# EAGLE board protoBoardHB (EAGLE 9.2.2)
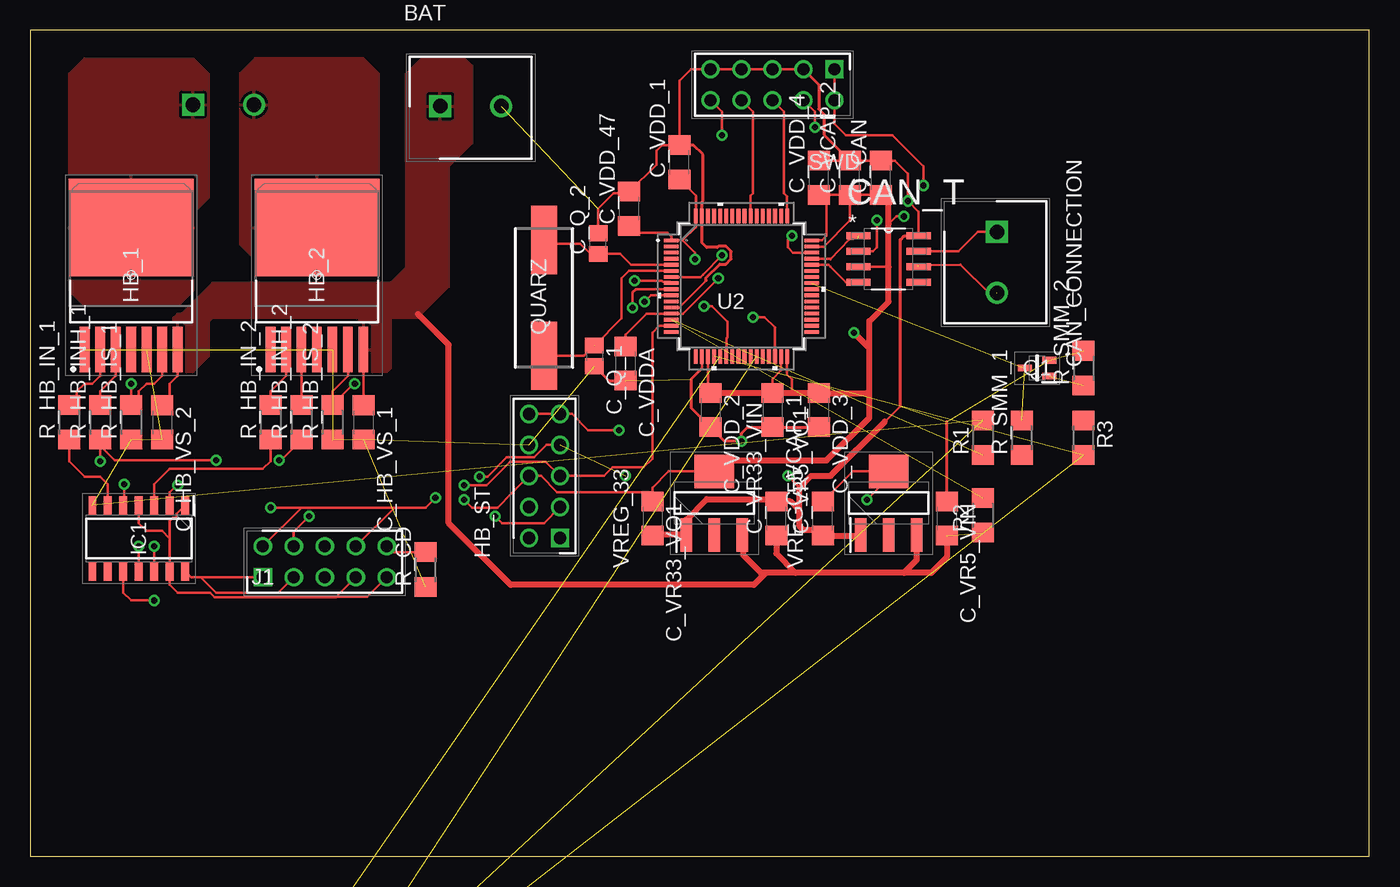
[diagram p0: board, top side]
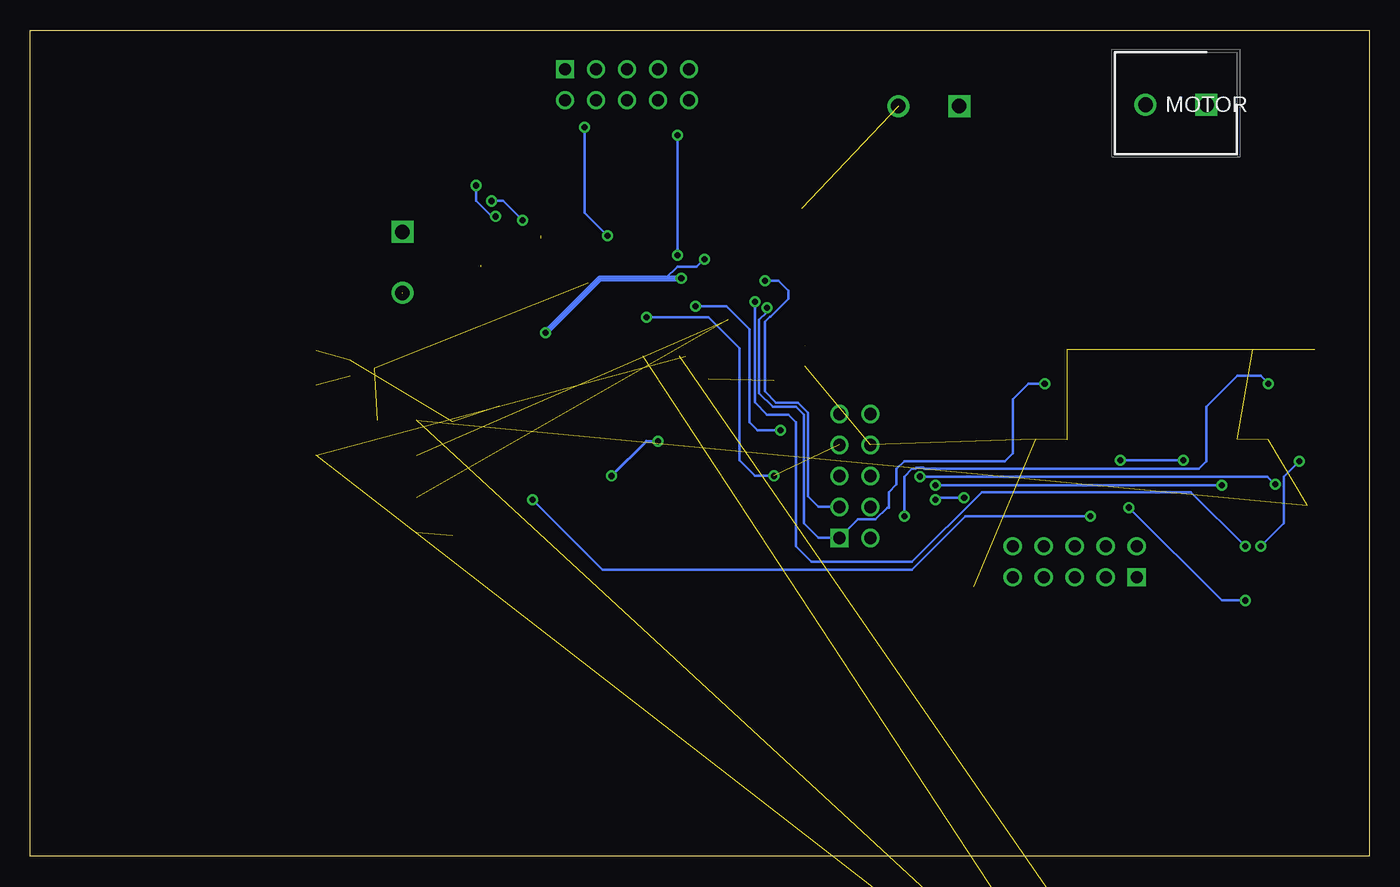
[diagram p1: board, bottom side, seen from below]

Size 109.77 x 67.68 mm. Coordinates in mm from the lower left corner, seen from the top.
Outline: 0,0 109.77,0 109.77,67.68 0,67.68 0,0
Copper layers (1*16): Top 0.035mm / dielectric 1.5mm / Bottom 0.035mm
Design rules "default": minimum track width 6mil, minimum drill 0.35mm, track to track 6mil, track to pad 6mil, pad to pad 6mil, via to via 6mil, smd to smd 6mil, copper to edge 40mil, drill to drill 6mil, minimum pad ring 10mil, minimum via ring 8mil, stop-mask expansion 4mil, vias tented up to drill 0mil, thermal gap 10mil
Net classes: 0 default: width 0.2 mm, drill 0.5 mm

## Footprints (pad centres in the part's own frame; a part is rotated, then mirrored left to right if it is on the bottom)
SHDR2W100P0X500_1X2_1000X820X1 = drill 1.2 pad 1.8 square: 1 0,0 | drill 1.2 pad 1.8: 2 5,0
C1206 = smd 1.6 x 1.8: 1 -1.4,0; 2 1.4,0
C0805 = smd 1.3 x 1.5: 1 -0.85,0; 2 0.85,0
SOIC127P600X175-8N = smd 1.981 x 0.559: 1 -2.464,1.905; 2 -2.464,0.635; 3 -2.464,-0.635; 4 -2.464,-1.905; 5 2.464,-1.905; 6 2.464,-0.635; 7 2.464,0.635; 8 2.464,1.905
TO127P1500X440-8N = smd 3.7 x 0.8: 1 -6.1,3.81; 2 -6.1,2.54; 3 -6.1,1.27; 4 -6.1,0; 5 -6.1,-1.27; 6 -6.1,-2.54; 7 -6.1,-3.81 | smd 8 x 10.25: 8 3.9,0
HDRV10W80P254_2X5_1270X508X864 = drill 1 pad 1.5 square: 1 0,0 | drill 1 pad 1.5: 2 0,2.54; 3 2.54,0; 4 2.54,2.54; 5 5.08,0; 6 5.08,2.54; 7 7.62,0; 8 7.62,2.54; 9 10.16,0; 10 10.16,2.54
SOIC127P600X175-14N = smd 1.525 x 0.65: 1 -2.712,3.81; 2 -2.712,2.54; 3 -2.712,1.27; 4 -2.712,0; 5 -2.712,-1.27; 6 -2.712,-2.54; 7 -2.712,-3.81; 8 2.712,-3.81; 9 2.712,-2.54; 10 2.712,-1.27; 11 2.712,0; 12 2.712,1.27; 13 2.712,2.54; 14 2.712,3.81
SOT65P220X100-3N = smd 1.15 x 0.55: 1 -1,0.65; 2 -1,-0.65; 3 1,0
ABLS-12.000MHZ-B2 = smd 5.6 x 2.1: 1 -4.75,0; 2 4.75,0
R1206 = smd 1.6 x 1.803: 1 -1.422,0; 2 1.422,0
LQFP64-10X10MM = smd 1.194 x 0.305: 1 -5.75,3.75; 2 -5.75,3.25; 3 -5.75,2.75; 4 -5.75,2.25; 5 -5.75,1.75; 6 -5.75,1.25; 7 -5.75,0.75; 8 -5.75,0.25; 9 -5.75,-0.25; 10 -5.75,-0.75; 11 -5.75,-1.25; 12 -5.75,-1.75; 13 -5.75,-2.25; 14 -5.75,-2.75; 15 -5.75,-3.25; 16 -5.75,-3.75; 33 5.75,-3.75; 34 5.75,-3.25; 35 5.75,-2.75; 36 5.75,-2.25; 37 5.75,-1.75; 38 5.75,-1.25; 39 5.75,-0.75; 40 5.75,-0.25; 41 5.75,0.25; 42 5.75,0.75; 43 5.75,1.25; 44 5.75,1.75; 45 5.75,2.25; 46 5.75,2.75; 47 5.75,3.25; 48 5.75,3.75 | smd 0.305 x 1.194: 17 -3.75,-5.75; 18 -3.25,-5.75; 19 -2.75,-5.75; 20 -2.25,-5.75; 21 -1.75,-5.75; 22 -1.25,-5.75; 23 -0.75,-5.75; 24 -0.25,-5.75; 25 0.25,-5.75; 26 0.75,-5.75; 27 1.25,-5.75; 28 1.75,-5.75; 29 2.25,-5.75; 30 2.75,-5.75; 31 3.25,-5.75; 32 3.75,-5.75; 49 3.75,5.75; 50 3.25,5.75; 51 2.75,5.75; 52 2.25,5.75; 53 1.75,5.75; 54 1.25,5.75; 55 0.75,5.75; 56 0.25,5.75; 57 -0.25,5.75; 58 -0.75,5.75; 59 -1.25,5.75; 60 -1.75,5.75; 61 -2.25,5.75; 62 -2.75,5.75; 63 -3.25,5.75; 64 -3.75,5.75
SOT230P700X180-4N = smd 2.75 x 0.95: 1 -2.6,2.3; 2 -2.6,0; 3 -2.6,-2.3 | smd 2.75 x 3.25: 4 2.6,0

## Placement (x,y rotation side)
BAT  282836-2  [SHDR2W100P0X500_1X2_1000X820X1]  33.61,61.48 0 top
C_CAN  100nF  [C1206]  69.73,55.61 90 top
C_HB_VS_1  0.47uF  [C1206]  27.3,35.56 270 top
C_HB_VS_2  0.47uF  [C1206]  10.79,35.56 270 top
C_Q_1  22pF  [C0805]  46.24,41.01 270 top
C_Q_2  22pF  [C0805]  46.56,50.21 90 top
C_VCAP_1  2.2uF  [C1206]  60.84,36.56 270 top
C_VCAP_2  2.2uF  [C1206]  67.19,55.61 90 top
C_VDD_1  100nF  [C1206]  53.23,56.88 90 top
C_VDD_2  100nF  [C1206]  55.77,36.56 270 top
C_VDD_3  100nF  [C1206]  64.66,36.56 270 top
C_VDD_4  100nF  [C1206]  64.66,55.61 90 top
C_VDD_47  4.7nF  [C1206]  49.1,53.07 90 top
C_VDDA  100nF  [C1206]  48.78,40.37 270 top
C_VR5_VIN  1uF  [C1206]  75.13,27.67 270 top
C_VR5_VO1  4.7uF  [C1206]  64.97,27.67 90 top
C_VR33_VIN  1uF  [C1206]  61.16,27.67 90 top
C_VR33_VO1  4.7uF  [C1206]  51,27.67 270 top
CAN_CONNECTION  282836-2  [SHDR2W100P0X500_1X2_1000X820X1]  79.26,51.16 270 top
CAN_T  SN65HVD230QD  [SOIC127P600X175-8N]  70.37,48.94 0 top
HB_1  BTN8982TA  [TO127P1500X440-8N]  8.26,47.62 90 top
HB_2  BTN8982TA  [TO127P1500X440-8N]  23.5,47.62 90 top
HB_ST  M20-9980545  [HDRV10W80P254_2X5_1270X508X864]  43.43,26.08 90 top
IC1  CD74HCT125M  [SOIC127P600X175-14N]  8.89,26.04 270 top
J1  M20-9980545  [HDRV10W80P254_2X5_1270X508X864]  19.05,22.86 0 top
MOTOR  282836-2  [SHDR2W100P0X500_1X2_1000X820X1]  13.34,61.59 180 bottom
Q1  SMMBT3904WT1G  [SOT65P220X100-3N]  82.55,40.01 180 top
QUARZ  ABLS-8.000MHZ-K4T  [ABLS-12.000MHZ-B2]  42.11,45.77 90 top
R1  [R1206]  78.11,34.29 90 top
R2  [R1206]  78.11,27.94 90 top
R3  [R1206]  86.36,34.29 270 top
R4  [R1206]  -1.27,-36.2 0 top  (outside the outline)
R5  [R1206]  -1.27,-40.64 0 top  (outside the outline)
R6  [R1206]  -1.27,-45.09 0 top  (outside the outline)
R7  [R1206]  -1.27,-49.53 0 top  (outside the outline)
R8  [R1206]  -1.27,-53.98 0 top  (outside the outline)
R_CD  1K  [R1206]  32.38,23.5 90 top
R_HB_IN_1  10K  [R1206]  3.17,35.56 90 top
R_HB_IN_2  10K  [R1206]  19.68,35.56 90 top
R_HB_INH_1  10K  [R1206]  5.71,35.56 90 top
R_HB_INH_2  10K  [R1206]  22.23,35.56 90 top
R_HB_IS_1  1k  [R1206]  8.26,35.56 90 top
R_HB_IS_2  1k  [R1206]  24.77,35.56 90 top
R_SMM_1  100K  [R1206]  81.28,34.29 90 top
R_SMM_2  100K  [R1206]  86.36,40.01 90 top
SWD  M20-9980545  [HDRV10W80P254_2X5_1270X508X864]  65.92,64.5 180 top
U2  STM32F4X5RG  [LQFP64-10X10MM]  58.3,46.72 0 top
VREG_33  LDL1117S33R  [SOT230P700X180-4N]  56.08,28.94 90 top
VREG_55  LDL1117S50R  [SOT230P700X180-4N]  70.37,28.94 90 top

## Library data of the parts
BAT CAN_CONNECTION MOTOR = SamacSys_Parts; DESCRIPTION: TERMINAL BLOCK, PCB MOUNT, SIDE WIRE ENTRY, STACKING , 5.00mm PITCH; HEIGHT: 10.2mm; MANUFACTURER_NAME: TE Connectivity; MANUFACTURER_PART_NUMBER: 282836-2; MOUSER_PART_NUMBER: 571-2828362
C_CAN C_HB_VS_1 C_HB_VS_2 C_Q_1 C_Q_2 C_VCAP_1 C_VCAP_2 C_VDD_1-C_VDD_4 C_VDD_47 C_VDDA C_VR5_VIN C_VR5_VO1 C_VR33_VIN C_VR33_VO1 R1-R8 R_CD R_HB_IN_1 R_HB_IN_2 R_HB_INH_1 R_HB_INH_2 R_HB_IS_1 R_HB_IS_2 R_SMM_1 R_SMM_2 = adafruit
CAN_T = ADP_Components; MF: TEXAS INSTRUMENTS; MPN: SN65HVD230QD..; OC_FARNELL: 1648752; OC_NEWARK: 75C7746; PACKAGE: SOIC-8; SUPPLIER: Texas Instruments
HB_1 HB_2 = SamacSys_Parts; DESCRIPTION: New Infineon BTN8982TA Motor Driver,, 7-Pin TO-263-7-1; HEIGHT: 4.4mm; MANUFACTURER_NAME: Infineon; MANUFACTURER_PART_NUMBER: BTN8982TA; MOUSER_PART_NUMBER: 726-BTN8982TA
HB_ST SWD = SamacSys_Parts; DESCRIPTION: M20 Header, Pin, Dil, Vertical, 5+5 W HARWIN M20 Series, 2.54mm Pitch 10 Way 2 Row Straight Pin Header, Through Hole, Solder Termination; HEIGHT: 8.64mm; MANUFACTURER_NAME: HARWIN; MANUFACTURER_PART_NUMBER: M20-9980545; MF: HARWIN; MOUSER_PART_NUMBER: 855-M20-9980545; MPN: M20-9980545; OC_FARNELL: 1022235
IC1 = SamacSys_Parts; DESCRIPTION: High Speed CMOS Logic Quad Buffers with 3-State Outputs; HEIGHT: 1.75mm; MANUFACTURER_NAME: Texas Instruments; MANUFACTURER_PART_NUMBER: CD74HCT125M; MOUSER_PART_NUMBER: 595-CD74HCT125M
J1 = SamacSys_Parts; DESCRIPTION: M20 Header, Pin, Dil, Vertical, 5+5 W HARWIN M20 Series, 2.54mm Pitch 10 Way 2 Row Straight Pin Header, Through Hole, Solder Termination; HEIGHT: 8.64mm; MANUFACTURER_NAME: HARWIN; MANUFACTURER_PART_NUMBER: M20-9980545; MOUSER_PART_NUMBER: 855-M20-9980545
Q1 = SamacSys_Parts; DESCRIPTION: ON SEMICONDUCTOR - SMMBT3904WT1G - TRANSISTOR, AEC-Q101, NPN, 40V, SOT-323; HEIGHT: 1mm; MANUFACTURER_NAME: ON Semiconductor; MANUFACTURER_PART_NUMBER: SMMBT3904WT1G; MOUSER_PART_NUMBER: 863-SMMBT3904WT1G
QUARZ = SamacSys_Parts; DESCRIPTION: ABRACON - ABLS-8.000MHZ-K4T - CRYSTAL, 8MHZ, 18PF, HC-49US; HEIGHT: mm; MANUFACTURER_NAME: ABRACON; MANUFACTURER_PART_NUMBER: ABLS-8.000MHZ-K4T; MF: ABRACON; MOUSER_PART_NUMBER: 815-ABLS-8.0MK4-T; MPN: ABLS-8.000MHZ-K4T; OC_FARNELL: 2467758
U2 = ADP_Components; MANUFACTURER_PART_NUMBER: STM32F4X5RG; OC_FARNELL: unknown; VENDOR: STMicroelectronics
VREG_33 = SamacSys_Parts; DESCRIPTION: STMICROELECTRONICS - LDL1117S33R - LDO, FIXED, 3.3V, 1.2A, SOT-223-3; HEIGHT: 1.8mm; MANUFACTURER_NAME: STMicroelectronics; MANUFACTURER_PART_NUMBER: LDL1117S33R; MF: STMICROELECTRONICS; MOUSER_PART_NUMBER: 511-LDL1117S33R; MPN: LDL1117S33R; OC_FARNELL: 2729708
VREG_55 = SamacSys_Parts; DESCRIPTION: STMICROELECTRONICS - LDL1117S50R - LDO, FIXED, 5V, 1.2A, SOT-223-3; HEIGHT: 1.8mm; MANUFACTURER_NAME: STMicroelectronics; MANUFACTURER_PART_NUMBER: LDL1117S50R; MF: STMICROELECTRONICS; MOUSER_PART_NUMBER: 511-LDL1117S50R; MPN: LDL1117S50R; OC_FARNELL: 2729709

## Nets
CAN1_RX: CAN_T.4 U2.44
CAN1_TX: CAN_T.1 U2.45
CANH: CAN_CONNECTION.1 CAN_T.7
CANL: CAN_CONNECTION.2 CAN_T.6
CD_EN: IC1.1 IC1.4 IC1.13 J1.7 J1.9
CD_VCC: IC1.14 J1.1 J1.3
GND: BAT.2 C_CAN.2 C_HB_VS_1.2 C_HB_VS_2.2 C_Q_1.2 C_Q_2.2 C_VCAP_1.2 C_VCAP_2.2 C_VDD_1.2 C_VDD_2.2 C_VDD_3.2 C_VDD_4.2 C_VDD_47.2 C_VDDA.2 C_VR5_VIN.1 C_VR5_VO1.1 C_VR33_VIN.2 C_VR33_VO1.2 CAN_T.2 CAN_T.8 HB_1.1 HB_1.5 HB_2.1 HB_2.5 HB_ST.8 IC1.7 Q1.2 R1.2 R4.2 R6.2 R8.2 R_CD.1 R_HB_IS_1.1 R_HB_IS_2.1 R_SMM_2.2 SWD.3 SWD.5 SWD.7 SWD.9 U2.12 U2.18 U2.63 VREG_33.1 VREG_55.1
IN_1: IC1.6 R_HB_IN_1.1
IN_2: IC1.3 R_HB_IN_2.1
IN_M_1: HB_ST.7 IC1.5 U2.30
IN_M_2: HB_ST.5 IC1.2 U2.15
INH: IC1.11 R_HB_INH_1.1 R_HB_INH_2.1
INH_EXT: HB_ST.9 HB_ST.10 U2.22
INH_M: IC1.12 U2.10
IS_1: HB_1.6 HB_ST.3 R_HB_IS_1.2 U2.8
IS_2: HB_2.6 HB_ST.1 R_HB_IS_2.2 U2.9
N$1: J1.10 R_CD.2
N$3: HB_1.2 R_HB_IN_1.2
N$4: HB_1.3 R_HB_INH_1.2
N$5: HB_2.2 R_HB_IN_2.2
N$6: HB_2.3 R_HB_INH_2.2
N$8: HB_ST.2
N$9: HB_ST.4
NRST: SWD.10 U2.7
OSC_IN: C_Q_2.1 QUARZ.2 U2.5
OSC_OUT: C_Q_1.1 QUARZ.1 U2.6
OUT_PA4: R3.1
OUT_PA5: R5.1
OUT_PB1: R7.1
PA0: R1.1 R2.2 U2.14
PA4: R3.2 R4.1 U2.20
PA5: R5.2 R6.1 U2.21
PA8: Q1.3 R_SMM_1.2 U2.41
PB1: R7.2 R8.1 U2.27
SS_VN: Q1.1 R_SMM_2.1
SS_VP: R_SMM_1.1
SWCLK: SWD.6 U2.49
SWDIO: SWD.4 U2.46
TRACESWO: SWD.8 U2.55
V5: C_VR5_VO1.2 J1.4 VREG_55.4
V12: BAT.1 C_HB_VS_1.1 C_HB_VS_2.1 C_VR5_VIN.2 C_VR33_VIN.1 HB_1.7 HB_2.7 R2.1 VREG_33.3 VREG_55.3
V33: C_CAN.1 C_VCAP_1.1 C_VCAP_2.1 C_VDD_1.1 C_VDD_2.1 C_VDD_3.1 C_VDD_4.1 C_VDD_47.1 C_VDDA.1 C_VR33_VO1.1 CAN_T.3 HB_ST.6 IC1.10 J1.2 J1.8 SWD.1 SWD.2 U2.1 U2.13 U2.19 U2.31 U2.32 U2.47 U2.48 U2.64 VREG_33.4
V_MOT_MIN: HB_2.8 MOTOR.2
V_MOT_PL: HB_1.8 MOTOR.1

## Tracks (layer width: path | path; a pad name or v marks a point on that pad's centre or on a via)
CAN1_RX
  Top 0.2: U2.44 65.44,48.47 65.61,48.31
  Top 0.203: 65.61,48.31 66.88,47.04 CAN_T.4
CAN1_TX  (1 unrouted)
  Top 0.2: U2.45 65.58,48.97 65.61,48.94
  Top 0.203: 65.61,48.94 67.17,50.55 67.91,50.63
CANH
  Top 0.203: CAN_T.7 76.08,49.58 77.67,51.16 CAN_CONNECTION.1
CANL  (2 unrouted)
  Top 0.203: 72.83,48.43 76.25,48.47 78.62,46.12 79.26,46.12
CD_EN
  Top 0.203: J1.7 25.08,21.27 | 25.08,21.27 25.04,21.23 15.09,21.23 14.74,21.59 12.06,21.59 11.43,22.23 IC1.13 11.43,26.04 | 11.43,26.04 11.43,27.48 11.68,27.73 11.86,27.73 12.01,27.88 12.01,28.06 IC1.1 | IC1.4 8.89,27.3 9.53,26.67 10.79,26.67 11.43,26.04 | 25.08,21.27 27.62,21.27 J1.9
CD_VCC
  Top 0.203: J1.1 13.97,22.86 | 13.97,22.86 13.16,22.86 IC1.14 | J1.3 20.32,21.59 15.24,21.59 13.97,22.86
GND  (via drill 0.5)  (21 unrouted)
  Top 0.2: U2.12 53.2,44.97 55.41,47.18 | U2.18 55.05,39.98
  Top 0.203: C_VDD_4.2 C_VCAP_2.2 C_CAN.2 70.88,57.01 71.96,55.93 v71.96,53.7 72.83,52.83 CAN_T.8 | CAN_T.2 69.1,49.58 69.42,49.9 v69.42,52.12 | C_Q_2.2 46.56,53.07 47.83,54.34 48.97,54.34 C_VDD_47.2 51.32,56.69 51.32,57.83 51.77,58.28 C_VDD_1.2 53.23,63.55 54.18,64.5 SWD.9 SWD.7 SWD.5 SWD.3 | 70.05,35.61 71.32,36.88
  Top 0.254: C_VR5_VIN.1 75.13,35.61 | 63.07,30.21 v62.12,31.16 | C_VDD_3.2 C_VCAP_1.2 58.81,35.16 58.3,34.66 v58.3,34.02 56.91,34.02 C_VDD_2.2 54.18,36.75 54.18,39.1 55.05,39.98 | C_Q_1.2 47.42,38.97 C_VDDA.2 | SWD.3 64.66,63.23 64.66,61.23 65.07,60.81 65.07,59.13 C_VCAP_2.2 | C_VDD_1.2 54.37,58.28 55.13,57.52 55.13,53.7 55.05,53.63 U2.63 55.05,50.29 55.45,49.9 56.32,49.9 56.41,49.99 57.02,49.99 57.45,49.56 57.45,48.96 57.02,48.53 56.52,48.53 55.41,47.41 55.41,47.18 | CAN_T.8 71.64,50.85 71.32,50.53 71.32,36.88
  Top 0.508: VREG_55.1 68,26.27 C_VR5_VO1.1 64.53,26.72 63.38,26.72 63.07,27.04 63.07,28.3 | 63.07,28.3 62.3,29.07 C_VR33_VIN.2 60.98,29.26 55.45,29.26 53.78,27.59 VREG_33.1 51.7,26.34 51.64,26.4 51.51,26.27 C_VR33_VO1.2 | 63.07,28.3 63.07,30.21 64.02,31.16 65.61,31.16 70.05,35.61
  Bottom 0.203: v69.42,52.12 71,53.7 v71.96,53.7
  Bottom 0.254: v62.12,31.16 59.26,34.02 v58.3,34.02
IN_1
  Top 0.203: R_HB_IN_1.1 3.17,32.38 4.45,31.11 5.71,31.11 6.35,30.48 IC1.6
IN_2
  Top 0.203: IC1.3 10.16,30.48 11.43,31.75 19.05,31.75 19.68,32.38 R_HB_IN_2.1
IN_M_1  (via drill 0.5)  (1 unrouted)
  Top 0.2: U2.30 61.05,43.34 60.21,44.18
  Top 0.203: 60.21,44.18 v59.26,44.18 | IC1.5 7.69,28.82 v7.69,30.48 | v36.83,31.11 37.47,31.11 39.04,32.69 41.3,32.69 42.31,33.7 HB_ST.7
  Bottom 0.203: v48.78,31.16 50.37,31.16 51.64,32.43 51.64,41.64 54.18,44.18 v59.26,44.18 | v7.69,30.48 8.33,31.11 v36.83,31.11
IN_M_2  (via drill 0.5)
  Top 0.2: U2.15 51.56,43.47 51,42.91
  Top 0.203: IC1.2 11.43,29.84 11.99,30.41 v12.06,30.41 | v35.56,30.41 37.39,30.41 39.32,32.34 42.25,32.34 HB_ST.5 47.04,31.16 47.74,31.87 50.28,31.87 51,32.59 51,42.91
  Bottom 0.203: v12.06,30.41 v35.56,30.41
INH  (via drill 0.5)
  Top 0.203: IC1.11 v8.89,25.4 | v5.71,32.38 5.71,33.66 | 5.71,33.66 R_HB_INH_1.1 | R_HB_INH_2.1 20.54,32.46 v20.39,32.46 | v15.24,32.46 6.91,32.46 5.71,33.66
  Bottom 0.203: v8.89,25.4 6.99,27.3 6.99,31.11 v5.71,32.38 | v20.39,32.46 v15.24,32.46
INH_EXT  (via drill 0.5)
  Top 0.203: v48.26,34.92 45.72,34.92 44.4,36.24 HB_ST.9 HB_ST.10 | v55.24,45.09 55.88,45.09 57.15,43.81 57.15,42.55 57.05,42.45 U2.22
  Bottom 0.203: v48.26,34.92 50.16,34.92 50.8,35.56 50.8,43.18 52.7,45.09 v55.24,45.09
INH_M  (via drill 0.5)
  Top 0.2: U2.10 50.89,45.97 v50.37,45.45
  Top 0.203: IC1.12 v10.16,25.4
  Bottom 0.203: v50.37,45.45 50.37,37.2 49.37,36.2 47.62,36.2 46.99,35.56 46.99,25.4 45.72,24.13 37.47,24.13 31.75,29.84 14.61,29.84 v10.16,25.4
IS_1  (via drill 0.5)
  Top 0.2: U2.8 52.46,47.06 51.85,47.06 51.74,47.18 v49.53,47.18 | v38.1,27.87 38.66,27.3 42.11,27.3 HB_ST.3
  Top 0.203: HB_1.6 10.79,39.37 10.16,38.73 9.53,38.73 8.89,38.1 8.89,37.62 R_HB_IS_1.2 v8.26,38.73
  Bottom 0.2: v49.53,47.18 48.45,47.18 47.62,46.35 47.62,45.7 49.09,44.23 49.11,44.23 49.53,43.81 49.53,38.1 48.61,37.18 46.84,37.18 46,36.34 46,29.49 45.13,28.62 HB_ST.3
  Bottom 0.203: v8.26,38.73 8.89,39.37 10.79,39.37 13.34,36.83 13.34,32.38 13.97,31.75 36.47,31.75 36.54,31.82 37.12,31.82 37.2,31.75 37.47,31.75 38.1,31.11 v38.1,27.87
IS_2  (via drill 0.5)
  Top 0.2: v49.38,44.94 49.38,46.21 49.65,46.47 U2.9
  Top 0.203: HB_2.6 26.04,39.37 24.77,38.1 R_HB_IS_2.2 26.52,38.73 v26.6,38.73
  Bottom 0.2: v49.38,44.94 49.38,44.6 50.01,43.97 50.01,37.95 48.9,36.83 46.99,36.83 46.35,36.2 46.35,27.3 45.13,26.08 HB_ST.1 41.89,27.62 40.47,27.62 39.51,28.57 39.37,28.57 39.37,29.84
  Bottom 0.203: v26.6,38.73 27.94,38.73 29.21,37.47 29.21,33.02 29.84,32.38 38.1,32.38 38.73,31.75 38.73,30.48 39.37,29.84
N$1
  Top 0.203: R_CD.2 29.69,24.92 J1.10
N$3
  Top 0.203: R_HB_IN_1.2 3.81,37.62 3.81,38.1 4.45,38.73 5.08,38.73 5.71,39.37 HB_1.2
N$4
  Top 0.203: R_HB_INH_1.2 5.71,38.1 6.99,39.37 HB_1.3
N$5
  Top 0.203: R_HB_IN_2.2 19.68,38.1 20.95,39.37 HB_2.2
N$6
  Top 0.203: R_HB_INH_2.2 HB_2.3
NRST  (via drill 0.5)
  Top 0.2: U2.7 54.93,47.47 55.13,47.67
  Top 0.203: SWD.10 56.72,61.01 v56.72,59.1 | 55.13,47.67 v56.72,49.26
  Bottom 0.203: v56.72,59.1 v56.72,49.26
OSC_IN
  Top 0.2: U2.5 49.25,48.47
  Top 0.203: QUARZ.2 42.43,50.2 45.09,50.2 45.92,49.36 C_Q_2.1 48.36,49.36 49.25,48.47
OSC_OUT  (1 unrouted)
  Top 0.2: U2.6 49.08,47.97
  Top 0.203: QUARZ.1 45.34,41.02 45.38,41.06 45.44,41.06 C_Q_1.1 48.46,44.08 48.46,47.35 49.08,47.97
PA0  (2 unrouted)
PA4  (2 unrouted)
PA5  (2 unrouted)
PA8  (2 unrouted)
PB1  (2 unrouted)
SS_VN  (1 unrouted)
SWCLK
  Top 0.2: U2.49 62.05,54.08 61.8,54.34
  Top 0.203: SWD.6 61.8,61.01 61.8,54.34
SWDIO  (via drill 0.5)
  Top 0.2: U2.46 62.54,49.47 62.12,49.9
  Top 0.203: SWD.4 64.34,61.01 v64.34,59.74 | v62.43,50.85 62.12,50.53 62.12,49.9
  Bottom 0.203: v64.34,59.74 64.34,52.75 v62.43,50.85
TRACESWO
  Top 0.2: U2.55 59.05,54.14 59.26,54.34
  Top 0.203: SWD.8 59.26,61.01 59.26,54.34
V5  (via drill 0.5)
  Top 0.203: C_VR5_VO1.2 67.44,31.54 VREG_55.4 70.37,31 v68.58,29.21 | J1.4 21.59,26.6 v22.86,27.87
  Bottom 0.203: v22.86,27.87 33.09,27.87 37.47,23.5 62.87,23.5 v68.58,29.21
V12  (1 unrouted)
  Top 0.203: 58.45,26.27 VREG_33.3 | C_HB_VS_2.1 11.43,37.59 11.43,38.73 12.06,39.37 HB_1.7 | C_HB_VS_1.1 HB_2.7
  Top 0.508: C_VR5_VIN.2 75.13,24.5 73.86,23.23 71.64,23.23 | 71.64,23.23 62.75,23.23 | 62.75,23.23 60.33,23.23 | 60.33,23.23 59.89,23.23 58.45,24.66 58.45,26.27 | C_VR33_VIN.1 61.16,24.81 62.75,23.23 | VREG_55.3 72.67,24.25 71.64,23.23 | 60.33,23.23 59.33,22.23 39.37,22.23 34.29,27.3 34.29,41.91 31.75,44.45
  pour Top: 35.56,65.41 32.07,65.41 30.8,64.14 30.8,48.26 29.53,46.99 14.92,46.99 12.38,44.45 12.06,44.45 11.75,44.13 11.75,40.01 12.06,39.69 13.34,39.69 14.61,40.96 14.61,43.81 14.92,44.13 31.75,44.13 34.29,46.67 34.29,56.52 36.2,58.42 36.2,64.77
  pour Top: 26.99,40.32 26.99,44.13 27.3,44.45 29.21,44.45 29.53,44.13 29.53,40.01 29.21,39.69 27.62,39.69
V33  (via drill 0.5)
  Top 0.2: U2.47 65.05,49.97 | U2.19 55.55,38.17 | U2.31 61.55,39.81 60.84,39.1 C_VCAP_1.1 | U2.32 62.05,39.48 62.43,39.1 62.43,37.96 | U2.48 64.91,50.47 65.29,50.85 65.29,53.58 C_VDD_4.1
  Top 0.203: C_VDDA.1 48.78,42.72 50.53,44.47 U2.13 53.52,44.47 v56.4,47.35 | 55.55,38.17 C_VDD_2.1 | C_VCAP_1.1 61.1,38.21 | 63.57,37.96 C_VDD_3.1 | C_VDD_4.1 64.66,54.02 64.84,54.21 C_VCAP_2.1 | C_VCAP_2.1 67.19,52.12 65.05,49.97 | C_VCAP_2.1 C_CAN.1 | 70.37,48.31 CAN_T.3 | C_VDD_1.1 54.55,54.15 U2.64 54.55,51.54 53.48,50.47 | C_VDD_47.1 49.66,51.1 52.24,51.1 52.55,50.79 U2.1 53.48,50.47 | v54.49,48.94 54.49,49.46 53.48,50.47 | C_VR33_VO1.1 51,29.84 | 51,29.84 51,30.21 52.33,31.54 VREG_33.4 | 70.37,51.8 71,52.44 v71.64,52.44 | v73.23,54.98 73.23,56.56 70.69,59.1 66.88,59.1 65.92,60.05 SWD.2 SWD.1 | J1.2 22.23,28.57 | 22.23,28.57 29.84,28.57 | J1.8 29.84,28.57 | IC1.10 7.62,21.59 8.26,20.95 v10.16,20.95 | v19.68,28.57 22.23,28.57 | 29.84,28.57 32.38,28.57 v33.2,29.39 | v35.56,29.21 36.2,28.57 38.3,28.57 39.47,29.75 HB_ST.6 41.86,31.16 43.18,29.84 51,29.84
  Top 0.508: VREG_33.4 56.98,32.43 65.29,32.43 68.78,35.92 68.78,38.15 | 68.78,38.15 68.78,41.64 | 68.78,41.64 68.78,43.86 70.37,45.45 70.37,48.31 70.37,51.8 70.37,53.58 C_CAN.1 | 68.78,38.15 68.59,37.96 C_VDD_3.1 62.43,37.96 61.35,37.96 61.1,38.21 | C_VCAP_1.1 C_VDD_2.1 | 68.78,41.64 v67.51,42.91
  Bottom 0.203: 57.67,47.35 56.72,48.31 55.13,48.31 v54.49,48.94 | v71.64,52.44 71.96,52.44 73.23,53.7 v73.23,54.98 | v10.16,20.95 12.06,20.95 v19.68,28.57 | v33.2,29.39 35.38,29.39 v35.56,29.21
  Bottom 0.508: v67.51,42.91 63.07,47.35 57.67,47.35 v56.4,47.35
V_MOT_MIN
  pour Top: 17.14,64.14 17.14,50.16 19.68,47.62 27.3,47.62 28.57,48.9 28.57,64.14 27.3,65.41 18.41,65.41
V_MOT_PL
  pour Top: 13.34,65.41 14.61,64.14 14.61,53.98 13.34,52.7 13.34,46.35 12.06,45.09 4.45,45.09 3.17,46.35 3.17,64.14 4.45,65.41